# Altium PCB SensorArray.PcbDoc
Units mm, origin at the board's own origin, x right, y up, seen from the top; angles counter-clockwise.
Board outline 560 x 18 mm, 2 copper layers (Top Layer, Bottom Layer); 74 components, 34 nets, 178 pads, 635 vias.
Unrouted connection lines stored in the file: 46.
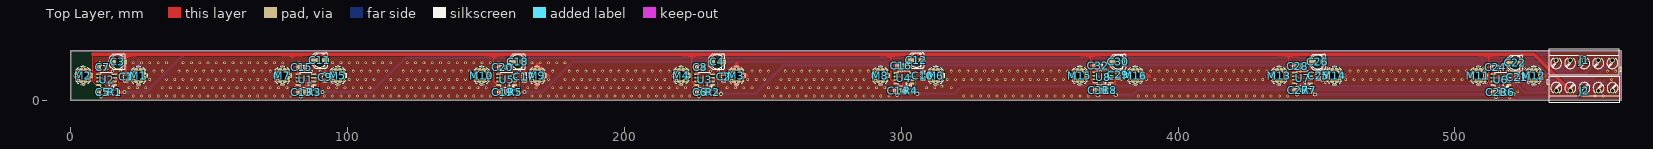
[diagram p0: Top Layer view]
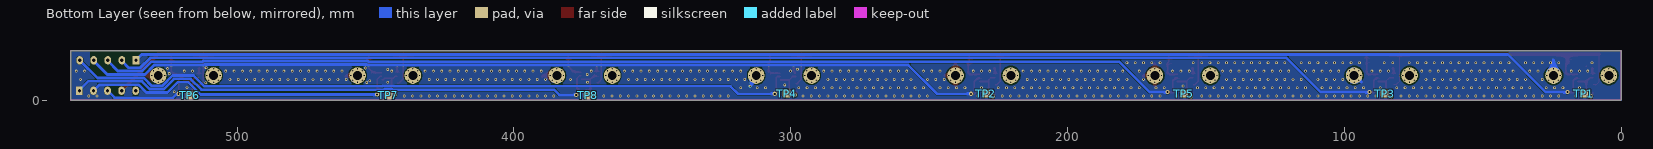
[diagram p1: Bottom Layer view, seen from below]
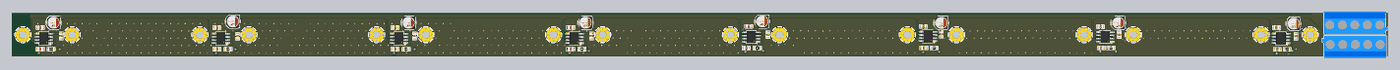
[diagram p2: 3D render of the assembled board from above, using the file's embedded part models]

## Layer stack, top to bottom
Top Solder: solder mask 0.0102, Solder Resist, Dk 3.5
Top Layer: signal copper 0.0356
Dielectric 1: dielectric 0.32, FR-4, Dk 4.8
Bottom Layer: signal copper 0.0356
Bottom Solder: solder mask 0.0102, Solder Resist, Dk 3.5

## Board outline
0,0 560,0 560,18 0,18

## Design rules (kind name [scope] priority, off if disabled: settings)
Clearance Clearance_1 [All] p1: gap=0.2 ignorepadtopadclearanceinfootprint=FALSE
Clearance [All vs InPolygon] p2: gap=0.3 ignorepadtopadclearanceinfootprint=FALSE
DiffPairsRouting [All] p1: maxlimit=0.254 minlimit=0.2 mostfreqgap=0.2 toplayer_minwidth=0.15 toplayer_maxwidth=10 toplayer_prefwidth=0.15 bottomlayer_minwidth=0.15 bottomlayer_maxwidth=10 bottomlayer_prefwidth=0.15 maxuncoupledlength=12.7
HoleSize [All] p1: absolutevalues=TRUE maxlimit=10 minlimit=0.5 maxpercent=80.000 minpercent=20.000
HoleToHoleClearance [All] p1: gap=0.3 allowstackedmicrovias=TRUE
PlaneClearance [All] p1: clearance=0.3
PlaneConnect [All] p1: planeconnectstyle=Relief reliefexpansion=0.5 reliefentries=4 reliefconductorwidth=0.4 reliefairgap=0.3
PolygonConnect PolygonConnect_Via [All vs IsVia] p1: connectstyle=Direct reliefconductorwidth=0.254 reliefentries=4 polygonreliefangle="90 Angle" airgapwidth=0.254
PolygonConnect PolygonConnect_Pad [All] p2: thpad.connectstyle=Relief thpad.reliefconductorwidth=0.4 thpad.reliefentries=4 thpad.polygonreliefangle="90 Angle" thpad.airgapwidth=0.3 smdpad.connectstyle=Direct smdpad.reliefconductorwidth=0.4 smdpad.reliefentries=4 smdpad.polygonreliefangle="90 Angle" smdpad.airgapwidth=0.3 via.connectstyle=Relief via.reliefconductorwidth=0.4 via.reliefentries=4 via.polygonreliefangle="90 Angle" via.airgapwidth=0.3
RoomDefinition gachbarg [InComponentClass('gachbarg')] p1: confinementstyle=ConfineIn formatcopy=TRUE lockcomponents=FALSE outline 278,29 556.099,29 556.099,40 278,40
RoutingVias [All] p1: holewidth=0.5 width=1 viastyle="Through Hole" minholewidth=0.5 minwidth=1 maxholewidth=0.5 maxwidth=10
SolderMaskExpansion [All] p1: expansion=0.102 istentingtop=FALSE
Width [All] p1: maxlimit=10 minlimit=0.2 preferedwidth=0.2
25 further rules are at their usual default settings.

## Components (designator, comment, footprint, x,y, rotation, side; value= is the part's Value field where it differs from the comment)
C1 "100nF" C0805 20,8.5 r90 top
C2 "100nF" C0805 235.9,8.5 r90 top
C3 "100uF" C_EL_5 17,14 r0 top
C4 "100uF" C_EL_5 233.5,14 r0 top
C5 "10nF" C0805 11.5,3 r0 top
C6 "10nF" C0805 227.5,3 r0 top
C7 "100nF" C0805 11.5,12 r180 top
C8 "100nF" C0805 227.5,12 r180 top
C9 "100nF" C0805 91.9,8.4 r90 top
C10 "100nF" C0805 307.8,9 r90 top
C11 "100uF" C_EL_5 90,14.5 r0 top
C12 "100uF" C_EL_5 305.5,14.5 r0 top
C13 "10nF" C0805 83.5,3 r0 top
C14 "10nF" C0805 299,3.5 r0 top
C15 "100nF" C0805 83.5,12 r180 top
C16 "100nF" C0805 300,12.5 r180 top
C17 "100nF" C0805 163.9,8.5 r90 top
C18 "100uF" C_EL_5 161.5,14 r0 top
C19 "10nF" C0805 156,3 r0 top
C20 "100nF" C0805 156,12 r180 top
C21 "100nF" C0805 522.6,8.4 r90 top
C22 "100uF" C_EL_5 521.8,13.6 r0 top
C23 "10nF" C0805 515.1,2.9 r0 top
C24 "100nF" C0805 514.7,12 r180 top
C25 "100nF" C0805 450.8,9 r90 top
C26 "100uF" C_EL_5 450.5,13.9 r0 top
C27 "10nF" C0805 443.4,3.6 r0 top
C28 "100nF" C0805 443.2,12.4 r180 top
C29 "100nF" C0805 378.4,9.3 r90 top
C30 "100uF" C_EL_5 378.4,13.9 r0 top
C31 "10nF" C0805 371.3,3.6 r0 top
C32 "100nF" C0805 371.1,12.5 r180 top
J1 "CONN_TB5" TBB_5 546.7,14.5 r0 top
J2 "CONN_TB5" TBB_5 546.8,3.5 r180 top
M1 "DNP/MH" SCMH_M3 24.5,9 r180 top locked
M2 "DNP/MH" SCMH_M3 4.5,9 r180 top locked
M3 "DNP/MH" SCMH_M3 240.5,9 r180 top
M4 "DNP/MH" SCMH_M3 220.5,9 r180 top
M5 "DNP/MH" SCMH_M3 96.5,9 r180 top
M6 "DNP/MH" SCMH_M3 312.5,9 r180 top
M7 "DNP/MH" SCMH_M3 76.5,9 r180 top
M8 "DNP/MH" SCMH_M3 292.5,9 r180 top
M9 "DNP/MH" SCMH_M3 168.5,9 r180 top
M10 "DNP/MH" SCMH_M3 148.456,9 r180 top
M11 "DNP/MH" SCMH_M3 508.5,9 r0 top
M12 "DNP/MH" SCMH_M3 528.5,9 r0 top
M13 "DNP/MH" SCMH_M3 436.5,9 r0 top
M14 "DNP/MH" SCMH_M3 456.5,9 r0 top
M15 "DNP/MH" SCMH_M3 364.5,9 r0 top
M16 "DNP/MH" SCMH_M3 384.5,9 r0 top
R1 "4.7M" R0805 16,3 r180 top
R2 "4.7M" R0805 232,3 r180 top
R3 "4.7M" R0805 88,3 r180 top
R4 "4.7M" R0805 303.5,3.5 r180 top
R5 "4.7M" R0805 160.5,3 r180 top
R6 "4.7M" R0805 519.1,2.9 r180 top
R7 "4.7M" R0805 447.4,3.6 r180 top
R8 "4.7M" R0805 375.4,3.6 r180 top
TP1 "TESTPOINT_SMD" TPSMD_S1 13.5,2.5 r270 bottom value=VALUE
TP2 "TESTPOINT_SMD" TPSMD_S1 229.5,2.5 r270 bottom value=VALUE
TP3 "TESTPOINT_SMD" TPSMD_S1 85.5,2.5 r270 bottom value=VALUE
TP4 "TESTPOINT_SMD" TPSMD_S1 301.5,2.5 r270 bottom value=VALUE
TP5 "TESTPOINT_SMD" TPSMD_S1 158,2.5 r270 bottom value=VALUE
TP6 "TESTPOINT_SMD" TPSMD_S1 517.1,1.9 r90 bottom value=VALUE
TP7 "TESTPOINT_SMD" TPSMD_S1 445.4,1.9 r90 bottom value=VALUE
TP8 "TESTPOINT_SMD" TPSMD_S1 373.3,1.9 r90 bottom value=VALUE
U1 "NE555" SO_8 85,7.5 r180 top
U2 "NE555" SO_8 13,7.5 r180 top
U3 "NE555" SO_8 229,7.5 r180 top
U4 "NE555" SO_8 301,8 r180 top
U5 "NE555" SO_8 157.5,7.5 r180 top
U6 "NE555" SO_8 516.6,7.5 r180 top
U7 "NE555" SO_8 445,8.1 r180 top
U8 "NE555" SO_8 372.9,8.3 r180 top

## Footprints (in the part's own frame and the unit in brackets; to place one, negate y for a bottom-side part, rotate by r counter-clockwise, add the part's x,y. Pads: shape width x height; smd on the part's side, far side on the other; paste and mask are expansions set on the pad)
C0805 [mm] "CHIP Capacitor, 2.0X1.3mm, 0805"
  rrect50% 1x1.2 smd paste-0.1 mask+0.075: 1(-1,0) 2(1,0)
  Top Layer pour cut-out: -0.5,0.8 0.5,0.8 0.5,-0.8 -0.5,-0.8
  silkscreen extent -1.7,-0.8 1.7,0.8, body extent -1,-0.62 1,0.63, height 1
C_EL_5 [mm] "Electrolytic Cap, D: 5.0mm, L: 5.8mm, Size C"
  rect 2.6x1.6 smd: 1(-2,0) 2(2,0)
  Top Layer pour cut-out: 1.905,2.667 1.905,-2.7 -1.905,-2.7 -1.905,2.667
  silkscreen extent -2.8,-2.8 2.8,2.8, body extent -3,-2.65 3,2.65
R0805 [mm] "CHIP RESISTOR 1/8 WATT ,2.0X1.3mm, 0805, 2012"
  rrect50% 1x1.2 smd paste-0.1 mask+0.075: 1(-1,0) 2(1,0)
  Top Layer pour cut-out: -0.5,0.8 0.5,0.8 0.5,-0.8 -0.5,-0.8
  silkscreen extent -1.7,-0.8 1.7,0.8, body extent -1.15,-0.67 1.15,0.68, height 0.76
SCMH_M3 [mm] "SCREW mouting, M3, 3.0mm diameter and 6.0mm PanHead"
  round 6 / inner round 3.5 / far side round 6 hole 3.2 mask+0.1: 1(0,0)
  Top Layer pour cut-out: 0,3.5 -1.339,3.234 -2.475,2.475 -3.234,1.339 -3.5,0 -3.5,0 -3.234,-1.339 -2.475,-2.475 -1.339,-3.234 0,-3.5 0,-3.5 1.75,-3.031 3.031,-1.75 3.5,0 3.5,0 3.234,1.339 2.475,2.475 1.339,3.234 0,3.5
  Bottom Layer pour cut-out: 0,3.5 -1.339,3.234 -2.475,2.475 -3.234,1.339 -3.5,0 -3.5,0 -3.234,-1.339 -2.475,-2.475 -1.339,-3.234 0,-3.5 0,-3.5 1.75,-3.031 3.031,-1.75 3.5,0 3.5,0 3.234,1.339 2.475,2.475 1.339,3.234 0,3.5
  silkscreen extent -3.3,-3.3 3.3,3.3
SO_8 [mm] "SOP-8, 5x3.9mm body 1.27mm pitch, SOT96-1, M08A, S8, SOIC8, VO8, MS-012AA(JEDEC), R-8, 8S2, VOG8"
  oval 2x0.6 smd: 1(-2.8,1.905) 2(-2.8,0.635) 3(-2.8,-0.635) 4(-2.8,-1.905) 5(2.8,-1.905) 6(2.8,-0.635) 7(2.8,0.635) 8(2.8,1.905)
  silkscreen extent -2.8,-2.7 2.1,2.8, body extent -3,-2.45 3,2.45, height 1.7
TBB_5 [mm] "Terminal Block Blue"
  round 2 / inner round 2 / far side rect 2.4x3 hole 1.2: 1(-10.16,0)
  round 2 / inner round 2 / far side oval 2.4x3 hole 1.2: 2(-5.08,0) 3(0,0) 4(5.08,0) 5(10.16,0)
  silkscreen extent -12.7,-5.2 13.42,4.1, body extent -12.65,-5.04 13.34,4.03, height 12.52
TPSMD_S1 [mm] "Test Point, SMD Pad, Circle, 1mm X 1mm"
  rrect50% 3x3 smd paste-1.016 mask+0.025: 1(0,0)
  silkscreen extent -0.6,-0.6 0.6,0.6

## Part data
C1 C2 C5 C6 C7 C8 C9 C10 C13 C14 C15 C16 C17 C19 C20 C21 C23 C24 C25 C27 C28 C29 C31 C32: library part CAP_SMD_MLCC_0805, "CAP, MLCC, -F, -V, MATERIAL, -%, 0201", ASSEMBLY=ASSEMBLY, MANF=-, MANF_P#=MANF_PART#, PARAM="-, -%", PARAM2=-V, PRICE="100= 1$"
C3 C4 C11 C12 C18 C22 C26 C30: library part CAP_SMD_EL, "CAP, THD, ELEC,", ASSEMBLY=ASSEMBLY, DESC=DESCRIPTION, DIST#=MOUSER, MANF=MANF, MANF_P#=MANF_PART#, PARAM=20%, PARAM2=-V, PRICE="10= -$"
J1 J2: "CONN, TERMINAL BLOCK, 5.08mm pitch"
M1 M2 M3 M4 M5 M6 M7 M8 M9 M10 M11 M12 M13 M14 M15 M16: library part SCMH_M3, "SCREW mouting, M3, 3.0mm diameter and 6.0mm PanHead", ASSEMBLY=DNP
R1 R2 R3 R4 R5 R6 R7 R8: library part RES_SMD, "RESISTOR, SMD", ASSEMBLY=ASSEMBLY, DESC=DESCRIPTION, DIST#=MOUSER, MANF=-, MANF_P#=-, PARAM=-W, PARAM2=1%, PRICE="100= 0.5$"
TP1 TP2 TP3 TP4 TP5 TP6 TP7 TP8: "TEST POINT", MANF=MANF, MANF_P#=MANF_P#
U1 U2 U3 U4 U5 U6 U7 U8: library part NE555_SOP8, "555 Timer, General-Purpose Single Bipolar Timer", MANF="Texas Instruments", MANF_P#=NE555DR,, PARAM="200mA output, 0~70oC", PARAM2=4.5~16V

## Via types
v1: diameter 1, hole 0.5, Top Layer to Bottom Layer, tented both sides, 491 vias
v2: diameter 0.8, hole 0.5, Top Layer to Bottom Layer, 128 vias
v3: diameter 1.5, hole 0.75, Top Layer to Bottom Layer, tented both sides, 16 vias

## Nets (pads, with @x,y where several pads share a name; then routed paths per layer and width w, separated by ;. In a path a pad name is that pad's centre, name@x,y a point inside that pad or via, vN(x,y) a via of type N, cw(c..) or ccw(c..) an arc to the next point about the centre after c; other vN are vias at no path point)
3V3: C1.2 C2.2 C3.2 C4.2 C9.2 C10.2 C11.2 C12.2 C17.2 C18.2 C21.2 C22.2 C25.2 C26.2 C29.2 C30.2 J2.4 U1.4 U1.8 U2.4 U2.8 U3.4 U3.8 U4.4 U4.8 U5.4 U5.8 U6.4 U6.8 U7.4 U7.8 U8.4 U8.8 | length 724
  Top Layer w0.3: 8,16.7 8,6.668 9.003,5.665 9.218,5.665 9.23,5.652 10.143,5.652 U2.8 ; 80.1,16.7 80.1,6.995 81.5,5.595 U1.8
  Top Layer w0.5: U2.4 20,9.405 C1.2 20,13.45 C3.2@19.45,14 ; U1.4 92,9.405 C11.2 92,16.6 91.9,16.7 ; 152.9,16.7 152.9,6.904 153.981,5.823 153.981,5.641 154.027,5.595 U5.8 ; U5.4 C17.2@163.5,9.405 ; 163.2,16.7 163.5,16.4 C18.2 163.9,13.6 C17.2 ; 224.4,16.7 224.4,6.904 225.481,5.823 225.481,5.641 225.527,5.595 U3.8 ; U3.4 C2.2@235.5,9.405 ; 235.405,16.7 235.5,16.605 C4.2 235.9,13.6 C2.2 ; 296.2,16.7 296.2,7.604 297.481,6.323 297.481,6.141 297.527,6.095 U4.8 ; U4.4@303.826,9.879 303.833,9.886 304.59,9.886 304.597,9.879 C10.2@307.5,9.879 ; 307.7,16.7 307.5,16.5 C12.2 308,14 308,10.2 C10.2 ; 368.4,16.7 368.4,7.604 369.381,6.623 369.381,6.441 369.427,6.395 U8.8 ; U8.4 378.305,10.205 C29.2 378.5,10.3 378.75,10.55 378.75,10.65 380.4,12.3 C30.2 380.4,16.605 380.305,16.7 ; 440,16.7 440,7.904 441.481,6.423 441.481,6.241 441.527,6.195 U7.8 ; U7.4 450.795,10.005 C25.2 450.9,10 451.15,10.25 451.15,10.35 452.5,11.7 C26.2 452.5,16.6 452.6,16.7 ; 512.2,16.7 512.2,6.704 513.081,5.823 513.081,5.641 513.127,5.595 U6.8 ; U6.4 522.595,9.405 C21.2 522.7,9.4 522.95,9.65 522.95,9.75 523.8,10.6 C22.2 523.8,16.6 523.7,16.7
  Top Layer w1: C3.2 19.3,14 19.6,14.3 19.6,16.7
  Top Layer w1.4: 8,16.7 19.6,16.7 80.1,16.7 91.9,16.7 152.9,16.7 163.2,16.7 224.4,16.7 235.405,16.7 296.2,16.7 307.7,16.7 368.4,16.7 380.305,16.7 440,16.7 452.6,16.7 512.2,16.7 523.7,16.7 528.52,16.7 J2.4 ; C3.2@19.3,14 C3.2@19.45,14
GND: C1.1 C2.1 C3.1 C4.1 C7.1 C8.1 C9.1 C10.1 C11.1 C12.1 C15.1 C16.1 C17.1 C18.1 C20.1 C21.1 C22.1 C24.1 C25.1 C26.1 C28.1 C29.1 C30.1 C32.1 J2.5 M1.1 M3.1 M5.1 M6.1 M9.1 M12.1 M14.1 M16.1 U1.1 U2.1 U3.1 U4.1 U5.1 U6.1 U7.1 U8.1 | length 81.1
  Top Layer w0.3: 160.3,4.3 160.6,4 ; 303.5,1.9 303.6,2 ; 375.2,2.2 375.3,2.3 ; 519.2,1.2 519.8,0.6 522,0.6
  Top Layer w0.5: C7.1@12.5,12.1 12.75,12.35 C7.1@12.85,12.35
  Top Layer w1: M5.1@95.887,9.613 M5.1 ; v2(166.1,9) 166.803,9.703 v2(166.803,10.697) 167.797,10.697 v2(168.5,11.4) ; v2(166.803,7.303) 167.797,7.303 v2(168.5,6.6) 168.5,5.3 168.4,5.2 ; 168.6,13.3 168.5,13.2 v2(168.5,11.4) ; v2(170.197,7.303) 170.197,8.297 v2(170.9,9) 172.5,9 172.7,8.8 ; v2(170.197,10.697) 169.203,10.697 v2(168.5,11.4) ; v2(238.1,9) 238.803,9.703 v2(238.803,10.697) ; v2(238.803,7.303) 239.797,7.303 v2(240.5,6.6) 240.5,5 ; v2(240.5,11.4) 240.5,13.3 240.7,13.5 ; v2(242.197,7.303) 242.197,8.297 v2(242.9,9) ; v2(242.197,10.697) 242.197,9.703 v2(242.9,9) ; 244.4,9 v2(242.9,9) ; v2(310.1,9) 310.803,9.703 v2(310.803,10.697) ; v2(310.803,7.303) 311.797,7.303 v2(312.5,6.6) 313.203,7.303 v2(314.197,7.303) ; v2(312.5,11.4) 313.203,10.697 v2(314.197,10.697) 314.197,9.703 v2(314.9,9) ; M16.1 v2(386.9,9) 389.4,9 389.8,8.6 ; M14.1 456.514,8.986 460.414,8.986 460.7,8.7 ; M12.1 v2(530.9,9) 532.8,9
  Bottom Layer w1: M1.1 v2(24.5,11.4) 24.5,14.5 24.6,14.6 ; 93.863,6.687 94.479,7.303 v2(94.803,7.303) 95.506,6.6 v2(96.5,6.6) 97.494,6.6 v2(98.197,7.303) 98.9,8.006 v2(98.9,9) 98.9,9.994 v2(98.197,10.697) 97.494,11.4 v2(96.5,11.4) 95.797,10.697 v2(94.803,10.697) M5.1 ; v2(314.197,7.303) 314.197,5.603 v1(314.7,5.1)
  other v1: 519.8,1 16.6,1.6 22.6,1.6 25.6,1.6 28.6,1.6 31.6,1.6 34.6,1.6 37.6,1.6 40.6,1.6 43.6,1.6 46.6,1.6 49.6,1.6 52.6,1.6 55.6,1.6 58.6,1.6 61.6,1.6 64.6,1.6 67.6,1.6 70.6,1.6 73.6,1.6 76.6,1.6 79.6,1.6 88.6,1.6 91.6,1.6 94.6,1.6 97.6,1.6 100.6,1.6 103.6,1.6 106.6,1.6 109.6,1.6 112.6,1.6 115.6,1.6 118.6,1.6 121.6,1.6 124.6,1.6 127.6,1.6 130.6,1.6 133.6,1.6 136.6,1.6 139.6,1.6 142.6,1.6 145.6,1.6 148.6,1.6 151.6,1.6 160.6,1.6 166.6,1.6 169.6,1.6 172.6,1.6 175.6,1.6 178.6,1.6 181.6,1.6 184.6,1.6 187.6,1.6 190.6,1.6 193.6,1.6 196.6,1.6 199.6,1.6 202.6,1.6 205.6,1.6 208.6,1.6 211.6,1.6 214.6,1.6 217.6,1.6 220.6,1.6 223.6,1.6 232.6,1.6 250.6,1.6 253.6,1.6 256.6,1.6 259.6,1.6 262.6,1.6 265.6,1.6 268.6,1.6 271.6,1.6 274.6,1.6 277.6,1.6 280.6,1.6 283.6,1.6 286.6,1.6 289.6,1.6 292.6,1.6 295.6,1.6 322.6,1.6 325.6,1.6 328.6,1.6 331.6,1.6 334.6,1.6 337.6,1.6 340.6,1.6 343.6,1.6 346.6,1.6 349.6,1.6 352.6,1.6 355.6,1.6 358.6,1.6 361.6,1.6 364.6,1.6 367.6,1.6 385.6,1.6 388.6,1.6 391.6,1.6 394.6,1.6 397.6,1.6 400.6,1.6 403.6,1.6 406.6,1.6 409.6,1.6 412.6,1.6 415.6,1.6 418.6,1.6 421.6,1.6 424.6,1.6 427.6,1.6 430.6,1.6 433.6,1.6 436.6,1.6 439.6,1.6 550.6,1.6 553.6,1.6 522.7,3.1 15.1,4.6 21.1,4.6 24.1,4.6 27.1,4.6 33.1,4.6 36.1,4.6 39.1,4.6 42.1,4.6 45.1,4.6 48.1,4.6 51.1,4.6 54.1,4.6 57.1,4.6 60.1,4.6 63.1,4.6 66.1,4.6 69.1,4.6 72.1,4.6 75.1,4.6 78.1,4.6 81.1,4.6 87.1,4.6 93.1,4.6 96.1,4.6 99.1,4.6 102.1,4.6 105.1,4.6 108.1,4.6 114.1,4.6 117.1,4.6 120.1,4.6 123.1,4.6 126.1,4.6 129.1,4.6 132.1,4.6 135.1,4.6 138.1,4.6 141.1,4.6 144.1,4.6 147.1,4.6 150.1,4.6 153.1,4.6 165.1,4.6 168.1,4.6 174.1,4.6 177.1,4.6 180.1,4.6 183.1,4.6 186.1,4.6 189.1,4.6 192.1,4.6 195.1,4.6 198.1,4.6 201.1,4.6 204.1,4.6 207.1,4.6 210.1,4.6 213.1,4.6 216.1,4.6 219.1,4.6 222.1,4.6 225.1,4.6 231.1,4.6 237.1,4.6 240.1,4.6 243.1,4.6 246.1,4.6 252.1,4.6 255.1,4.6 258.1,4.6 261.1,4.6 264.1,4.6 267.1,4.6 270.1,4.6 273.1,4.6 276.1,4.6 279.1,4.6 282.1,4.6 285.1,4.6 288.1,4.6 291.1,4.6 294.1,4.6 297.1,4.6 309.1,4.6 312.1,4.6 318.1,4.6 518.1,4.7 158.3,5.2 302.2,5.6 511.3,6.4 453.2,6.5 373.4,6.6 445.6,6.6 452.1,7.1 28.6,7.6 34.6,7.6 37.6,7.6 40.6,7.6 43.6,7.6 46.6,7.6 49.6,7.6 52.6,7.6 55.6,7.6 58.6,7.6 61.6,7.6 64.6,7.6 67.6,7.6 70.6,7.6 100.6,7.6 103.6,7.6 106.6,7.6 109.6,7.6 115.6,7.6 118.6,7.6 121.6,7.6 124.6,7.6 127.6,7.6 130.6,7.6 133.6,7.6 136.6,7.6 139.6,7.6 142.6,7.6 172.6,7.6 178.6,7.6 181.6,7.6 184.6,7.6 187.6,7.6 190.6,7.6 193.6,7.6 196.6,7.6 199.6,7.6 202.6,7.6 205.6,7.6 208.6,7.6 211.6,7.6 214.6,7.6 244.6,7.6 247.6,7.6 250.6,7.6 256.6,7.6 259.6,7.6 262.6,7.6 265.6,7.6 268.6,7.6 271.6,7.6 274.6,7.6 277.6,7.6 280.6,7.6 283.6,7.6 286.6,7.6 316.6,7.6 319.6,7.6 322.6,7.6 325.6,7.6 328.6,7.6 331.6,7.6 334.6,7.6 337.6,7.6 340.6,7.6 343.6,7.6 346.6,7.6 349.6,7.6 352.6,7.6 355.6,7.6 358.6,7.6 379.6,7.6 388.6,7.6 391.6,7.6 394.6,7.6 397.6,7.6 400.6,7.6 403.6,7.6 406.6,7.6 409.6,7.6 412.6,7.6 415.6,7.6 418.6,7.6 421.6,7.6 424.6,7.6 427.6,7.6 430.6,7.6 460.6,7.6 463.6,7.6 466.6,7.6 469.6,7.6 472.6,7.6 475.6,7.6 478.6,7.6 481.6,7.6 484.6,7.6 487.6,7.6 490.6,7.6 493.6,7.6 496.6,7.6 499.6,7.6 502.6,7.6 556.6,7.6 373.5,9.4 524.5,9.7 12.1,10.6 15.1,10.6 18.1,10.6 30.1,10.6 33.1,10.6 39.1,10.6 42.1,10.6 45.1,10.6 48.1,10.6 51.1,10.6 54.1,10.6 57.1,10.6 60.1,10.6 63.1,10.6 66.1,10.6 69.1,10.6 72.1,10.6 84.1,10.6 87.1,10.6 90.1,10.6 102.1,10.6 105.1,10.6 108.1,10.6 111.1,10.6 114.1,10.6 120.1,10.6 123.1,10.6 126.1,10.6 129.1,10.6 132.1,10.6 135.1,10.6 138.1,10.6 141.1,10.6 144.1,10.6 156.1,10.6 159.1,10.6 162.1,10.6 174.1,10.6 180.1,10.6 183.1,10.6 186.1,10.6 189.1,10.6 192.1,10.6 195.1,10.6 198.1,10.6 201.1,10.6 204.1,10.6 207.1,10.6 210.1,10.6 213.1,10.6 216.1,10.6 228.1,10.6 231.1,10.6 234.1,10.6 246.1,10.6 249.1,10.6 252.1,10.6 258.1,10.6 261.1,10.6 264.1,10.6 267.1,10.6 270.1,10.6 273.1,10.6 276.1,10.6 279.1,10.6 282.1,10.6 285.1,10.6 288.1,10.6 300.1,10.6 318.1,10.6 321.1,10.6 324.1,10.6 327.1,10.6 330.1,10.6 333.1,10.6 336.1,10.6 339.1,10.6 342.1,10.6 345.1,10.6 348.1,10.6 351.1,10.6 354.1,10.6 357.1,10.6 360.1,10.6 372.1,10.6 390.1,10.6 393.1,10.6 396.1,10.6 399.1,10.6 402.1,10.6 405.1,10.6 408.1,10.6 411.1,10.6 414.1,10.6 417.1,10.6 420.1,10.6 423.1,10.6 426.1,10.6 429.1,10.6 432.1,10.6 444.1,10.6 462.1,10.6 465.1,10.6 468.1,10.6 471.1,10.6 474.1,10.6 477.1,10.6 480.1,10.6 483.1,10.6 486.1,10.6 489.1,10.6 492.1,10.6 495.1,10.6 498.1,10.6 501.1,10.6 504.1,10.6 516.1,10.6 519.1,10.6 555.1,10.6 558.1,10.6 445.6,11.2 297.6,11.3 525.1,11.5 453.6,11.7 511.2,11.8 10.6,13.6 22.6,13.6 25.6,13.6 28.6,13.6 31.6,13.6 34.6,13.6 40.6,13.6 43.6,13.6 46.6,13.6 49.6,13.6 52.6,13.6 55.6,13.6 58.6,13.6 61.6,13.6 64.6,13.6 67.6,13.6 70.6,13.6 73.6,13.6 76.6,13.6 82.6,13.6 85.6,13.6 94.6,13.6 97.6,13.6 100.6,13.6 103.6,13.6 106.6,13.6 109.6,13.6 112.6,13.6 115.6,13.6 121.6,13.6 124.6,13.6 127.6,13.6 130.6,13.6 133.6,13.6 136.6,13.6 139.6,13.6 142.6,13.6 145.6,13.6 148.6,13.6 151.6,13.6 154.6,13.6 166.6,13.6 169.6,13.6 172.6,13.6 175.6,13.6 178.6,13.6
  other v2: 24.5,6.6 384.5,6.6 456.5,6.6 528.5,6.6 22.803,7.303 26.197,7.303 382.803,7.303 386.197,7.303 454.803,7.303 458.197,7.303 526.803,7.303 530.197,7.303 22.1,9 26.9,9 94.1,9 382.1,9 454.1,9 458.9,9 526.1,9 22.803,10.697 26.197,10.697 382.803,10.697 386.197,10.697 454.803,10.697 458.197,10.697 526.803,10.697 530.197,10.697 384.5,11.4 456.5,11.4 528.5,11.4
NetC5_1: C5.1 TP1.1 | length 4.6
  Top Layer w0.6: C5.1 10.5,2 v3(11,1.5)
  Bottom Layer w0.6: v3(11,1.5) 11.974,1.5 11.995,1.52 12.52,1.52 TP1.1
NetC5_2: C5.2 R1.2 U2.2 U2.6 | length 12.5
  Top Layer w0.6: U2.6 11.365,8.135 12.635,6.865 ; R1.2 C5.2 12.635,3.135 12.635,6.865 ; U2.2 12.635,6.865
NetC6_1: C6.1 TP2.1 | length 4.6
  Top Layer w0.6: C6.1 226.5,2 v3(227,1.5)
  Bottom Layer w0.6: v3(227,1.5) 227.974,1.5 227.995,1.52 228.52,1.52 TP2.1
NetC6_2: C6.2 R2.2 U3.2 U3.6 | length 12.9
  Top Layer w0.6: U3.6 227.865,8.135 228.5,7.5 228.5,7 ; R2.2 C6.2 228.5,6.865 228.5,7 ; U3.2 228.635,6.865 228.5,7
NetC7_2: C7.2 U2.5 | length 2.8
  Top Layer w0.6: U2.5 10.361,9.405 10.5,9.544 C7.2
NetC8_2: C8.2 U3.5 | length 2.7
  Top Layer w0.6: U3.5 226.2,11.546 226.5,11.846 C8.2
NetC13_1: C13.1 TP3.1 | length 4.7
  Top Layer w0.6: C13.1 82.7,2.8 82.7,2.044 83.1,1.644 v3(83.1,1.4)
  Bottom Layer w0.6: v3(83.1,1.4) 83.344,1.4 83.521,1.578 84.578,1.578 TP3.1
NetC13_2: C13.2 R3.2 U1.2 U1.6 | length 12.8
  Top Layer w0.3: C13.2 C13.2@84.5,3.126
  Top Layer w0.6: U1.6 83.865,8.135 85,7 85,3.626 C13.2@84.5,3.126 ; C13.2 R3.2 ; 85,6.865 U1.2
NetC14_1: C14.1 TP4.1 | length 4.9
  Top Layer w0.6: C14.1 298,2.5 v3(298.5,2)
  Bottom Layer w0.6: v3(298.5,2) 301,2 TP4.1
NetC14_2: C14.2 R4.2 U4.2 U4.6 | length 12.8
  Top Layer w0.3: C14.2 C14.2@300,3.626
  Top Layer w0.6: U4.6 299.365,8.635 300.5,7.5 300.5,4.126 C14.2@300,3.626 ; C14.2 R4.2 ; 300.5,7.365 U4.2
NetC15_2: C15.2 U1.5 | length 2.7
  Top Layer w0.6: U1.5 82.2,11.546 82.5,11.846 C15.2
NetC16_2: C16.2 U4.5 | length 3.2
  Top Layer w0.3: U4.5@298.636,9.905 U4.5@298.774,10.044
  Top Layer w0.6: U4.5 U4.5@298.636,9.905 ; U4.5@298.774,10.044 298.774,10.479 299,10.705 C16.2
NetC19_1: C19.1 TP5.1 | length 4.6
  Top Layer w0.6: C19.1 155,2 v3(155.5,1.5)
  Bottom Layer w0.6: v3(155.5,1.5) 156.474,1.5 156.495,1.52 157.02,1.52 TP5.1
NetC19_2: C19.2 R5.2 U5.2 U5.6 | length 12.6
  Top Layer w0.6: U5.6 155.865,8.135 157,7 C19.2 R5.2 ; 157,6.865 U5.2
NetC20_2: C20.2 U5.5 | length 2.7
  Top Layer w0.6: U5.5 154.7,11.546 155,11.846 C20.2
NetC23_1: C23.1 TP6.1 | length 4.4
  Top Layer w0.5: C23.1 514.207,2.793 514.207,1.993 v3(514.9,1.3)
  Bottom Layer w0.5: v3(514.9,1.3) 514.95,1.35 516.55,1.35 TP6.1
NetC23_2: C23.2 R6.2 U6.2 U6.6 | length 12.4
  Top Layer w0.5: U6.6 515.365,8.135 516.1,7.4 516.1,6.8 ; R6.2 C23.2 516.1,6.8 ; U6.2 516.165,6.865 516.1,6.8
NetC24_2: C24.2 U6.5 | length 2.7
  Top Layer w0.5: C24.2 513.7,9.451 513.746,9.405 U6.5
NetC27_1: C27.1 TP7.1 | length 4.4
  Top Layer w0.6: C27.1 442.4,2.5 442.8,2.1 v3(443,2.1)
  Bottom Layer w0.6: v3(443,2.1) 443.15,2.25 445.25,2.25 TP7.1@445.4,2.4
NetC27_2: C27.2 R7.2 U7.2 U7.6 | length 12.9
  Top Layer w0.6: U7.6 442.9,8.735 442.9,8.729 443.629,8 ; R7.2 C27.2 444.229,3.771 444.229,7.4 443.629,8 ; U7.2 447.1,7.465 447.1,7.604 446.704,8 443.629,8
NetC28_2: C28.2 U7.5 | length 2.4
  Top Layer w0.5: U7.5 C28.2
NetC31_1: C31.1 TP8.1 | length 4.4
  Top Layer w0.6: C31.1 370.3,2.5 v3(371,1.8)
  Bottom Layer w0.6: v3(371,1.8) 371.031,1.831 373.231,1.831 TP8.1
NetC31_2: C31.2 R8.2 U8.2 U8.6 | length 12.4
  Top Layer w0.6: U8.6 371.065,8.935 372.4,7.6 372.4,3.7 C31.2 R8.2 ; 372.335,7.665 U8.2
NetC32_2: C32.2 U8.5 | length 2.3
  Top Layer w0.6: U8.5 C32.2
Out1: J1.1 R1.1 U2.3 | length 532.6
  Top Layer w0.6: U2.3 16.5,8.135 16.5,8.1 17.387,7.213 17.387,3.787 17.2,3.6 17.2,3.2 R1.1 v3(19.5,3)
  Bottom Layer w1: v3(19.5,3) 27.4,3 41,16.6 534.44,16.6 535.54,15.5 535.84,15.5 536.54,14.8 J1.1
Out2: J1.2 R3.1 U1.3 | length 467
  Top Layer w0.6: U1.3 88.565,8.135 89.404,7.296 89.404,3.558 89,3.154 R3.1 v3(91,3)
  Bottom Layer w1: v3(91,3) 108.6,3 121,15.4 531.39,15.4 534.99,11.8 539.22,11.8 541.62,14.2 J1.2
Out3: J1.3 R5.1 U5.3 | length 399.6
  Top Layer w0.6: U5.3 161.065,8.135 162,7.2 162,3.6 161.5,3.1 R5.1 v3(163.9,3)
  Bottom Layer w1: v3(163.9,3) 170.4,3 181.4,14 452.506,14 452.706,14.2 512.194,14.2 512.394,14 530.9,14 534.3,10.6 543.1,10.6 546.7,14.2 J1.3
Out4: J1.4 R2.1 U3.3 | length 333.4
  Top Layer w0.6: U3.3 232.461,8.135 233.7,6.896 233.7,3.7 R2.1@233.3,3.3 ; R2.1 233,2.9 233.2,2.7 233.3,2.7 233.6,2.4 v3(234.9,2.4)
  Bottom Layer w1: v3(234.9,2.4) 247.2,2.4 257.6,12.8 453.003,12.8 453.203,13 511.697,13 511.897,12.8 529.933,12.8 533.333,9.4 546.9,9.4 551.78,14.28 J1.4
Out5: J1.5 R4.1 U4.3 | length 267.9
  Top Layer w0.3: R4.1@304.904,3.95 R4.1@304.95,3.95 ; 305.3,8.191 305.3,8.245
  Top Layer w0.6: U4.3 304.91,8.635 305.3,8.245 ; R4.1@304.904,3.95 304.5,3.546 R4.1 304.5,3.4 304.7,3.2 304.8,3.2 305.6,2.4 v3(305.8,2.4) ; R4.1@304.95,3.95 305.3,4.3 305.3,8.191
  Bottom Layer w1: v3(305.8,2.4) 319.1,2.4 321.8,5.1 443.352,5.1 443.552,5.3 447.248,5.3 447.448,5.1 511.8,5.1 515.7,9 523.267,9 526.967,5.3 530.9,5.3 533.7,8.1 550.46,8.1 J1.5
Out6: J2.1 R8.1 U8.3 | length 194.6
  Top Layer w0.6: U8.3 376.4,8.935 376.4,8.796 377.2,7.996 377.2,4.4 R8.1@376.7,3.9 ; R8.1 376.6,3.4 376.6,3 377.5,2.1 v3(377.5,2)
  Bottom Layer w1: v3(377.5,2) 383.6,2 385.5,3.9 443.849,3.9 444.049,4.1 446.751,4.1 446.951,3.9 512.9,3.9 516.8,7.8 522.77,7.8 526.47,4.1 531.6,4.1 534.4,6.9 553.8,6.9 556.2,4.5 556.26,4.5 556.96,3.8 J2.1
Out7: J2.3 R6.1 U6.3 | length 35.5
  Top Layer w0.5: U6.3 519.419,8.116 520.484,8.116 521,7.6 521,3.8 520.45,3.25 520.35,3.25 520.1,3 520.1,2.805 520.35,2.555 521.045,2.555 v3(521.2,2.4)
  Bottom Layer w1: v3(521.2,2.4) 521.296,2.304 521.799,2.304 523.103,1 544.3,1 J2.3
Out8: J2.2 R7.1 U7.3 | length 116.1
  Top Layer w0.6: U7.3 448.5,8.735 448.5,8.596 449.4,7.696 449.4,4.6 R7.1@448.7,3.9 ; R7.1 448.6,3.4 448.6,2.9 v3(449.4,2.1)
  Bottom Layer w1: v3(449.4,2.1) 513.2,2.1 517.7,6.6 521.4,6.6 525.1,2.9 532.8,2.9 535.5,5.6 535.753,5.6 535.853,5.7 547.587,5.7 547.687,5.6 549.78,5.6 J2.2
pads on no net: M2.1 M4.1 M7.1 M8.1 M10.1 M11.1 M13.1 M15.1 U1.7 U2.7 U3.7 U4.7 U5.7 U6.7 U7.7 U8.7
copper on no net:
  other v2: 4.5,6.6 76.5,6.6 148.456,6.6 220.5,6.6 292.5,6.6 364.5,6.6 436.5,6.6 508.5,6.6 2.803,7.303 6.197,7.303 74.803,7.303 78.197,7.303 146.759,7.303 150.153,7.303 218.803,7.303 222.197,7.303 290.803,7.303 294.197,7.303 362.803,7.303 366.197,7.303 434.803,7.303 438.197,7.303 506.803,7.303 510.197,7.303 2.1,9 6.9,9 74.1,9 78.9,9 146.056,9 150.856,9 218.1,9 222.9,9 290.1,9 294.9,9 362.1,9 366.9,9 434.1,9 438.9,9 506.1,9 510.9,9 2.803,10.697 6.197,10.697 74.803,10.697 78.197,10.697 146.759,10.697 150.153,10.697 218.803,10.697 222.197,10.697 290.803,10.697 294.197,10.697 362.803,10.697 366.197,10.697 434.803,10.697 438.197,10.697 506.803,10.697 510.197,10.697 4.5,11.4 76.5,11.4 148.456,11.4 220.5,11.4 292.5,11.4 364.5,11.4 436.5,11.4 508.5,11.4

## Polygon pours and split planes (outlines as drawn)
GND on Bottom Layer "GND_L02_P001" (solid, pour order 1): 560,17.9 559.8,18.1 0,18.1 0,0.2 0.2,0 560,0
GND on Top Layer "GND_L01_P003" (solid, remove dead copper, pour order 3): 560,17.9 559.8,18.1 0,18.1 0,0.2 0.2,0 560,0

## Keep-outs
Keep-Out Layer:
  the board outline again, w0.3

## Other copper
Bottom Layer:
  region net GND: 530,10.4 529.5,10.9 527.7,10.9 526.6,9.8 526.6,8.2 527.8,7 529.4,7 530.2,7.8 530.7,7.3 530.7,7.2 529.9,6.4 528.5,6.4 528.4,6.3 528.3,6.4 527.3,6.4 526.3,7.4 526.3,8.5 525.8,9 526.1,9.3 526.1,10.5 527.3,11.7 529,11.7 529.7,11 530.4,11 530.4,10.9 530.7,10.6
  region net GND: 458,10.4 457.5,10.9 455.7,10.9 454.6,9.8 454.6,8.2 455.8,7 457.4,7 458.2,7.8 458.7,7.3 458.7,7.2 457.9,6.4 456.5,6.4 456.4,6.3 456.3,6.4 455.3,6.4 454.3,7.4 454.3,8.5 453.8,9 454.1,9.3 454.1,10.5 455.3,11.7 457,11.7 457.7,11 458.4,11 458.4,10.9 458.7,10.6
  region net GND: 386,10.4 385.5,10.9 383.7,10.9 382.6,9.8 382.6,8.2 383.8,7 385.4,7 386.2,7.8 386.7,7.3 386.7,7.2 385.9,6.4 384.5,6.4 384.4,6.3 384.3,6.4 383.3,6.4 382.3,7.4 382.3,8.5 381.8,9 382.1,9.3 382.1,10.5 383.3,11.7 385,11.7 385.7,11 386.4,11 386.4,10.9 386.7,10.6
  region net GND: 95.1,10.5 94.6,10 94.6,8.2 95.7,7.1 97.3,7.1 98.5,8.3 98.5,9.9 97.7,10.7 98.2,11.2 98.3,11.2 99.1,10.4 99.1,9 99.2,8.9 99.1,8.8 99.1,7.8 98.1,6.8 97,6.8 96.5,6.3 96.2,6.6 95,6.6 93.8,7.8 93.8,9.5 94.5,10.2 94.5,10.9 94.6,10.9 94.9,11.2
  region net GND: 23.1,10.5 22.6,10 22.6,8.2 23.7,7.1 25.3,7.1 26.5,8.3 26.5,9.9 25.7,10.7 26.2,11.2 26.3,11.2 27.1,10.4 27.1,9 27.2,8.9 27.1,8.8 27.1,7.8 26.1,6.8 25,6.8 24.5,6.3 24.2,6.6 23,6.6 21.8,7.8 21.8,9.5 22.5,10.2 22.5,10.9 22.6,10.9 22.9,11.2
  pour cut-out: 539.2,5.5 541.6,3.1 546.5,3.1 553.3,9.9 553.3,18.7 533.7,18.7 535.3,17.1 535.3,12.5 538,9.8 539.9,9.8